# Altium PCB PCB1.PcbDoc
Units mm, origin at the board's own origin, x right, y up, seen from the top; angles counter-clockwise.
Board outline 27.69 x 23.62 mm, 2 copper layers (Top Layer, Bottom Layer); 3 components, 5 nets, 11 pads, 0 vias.
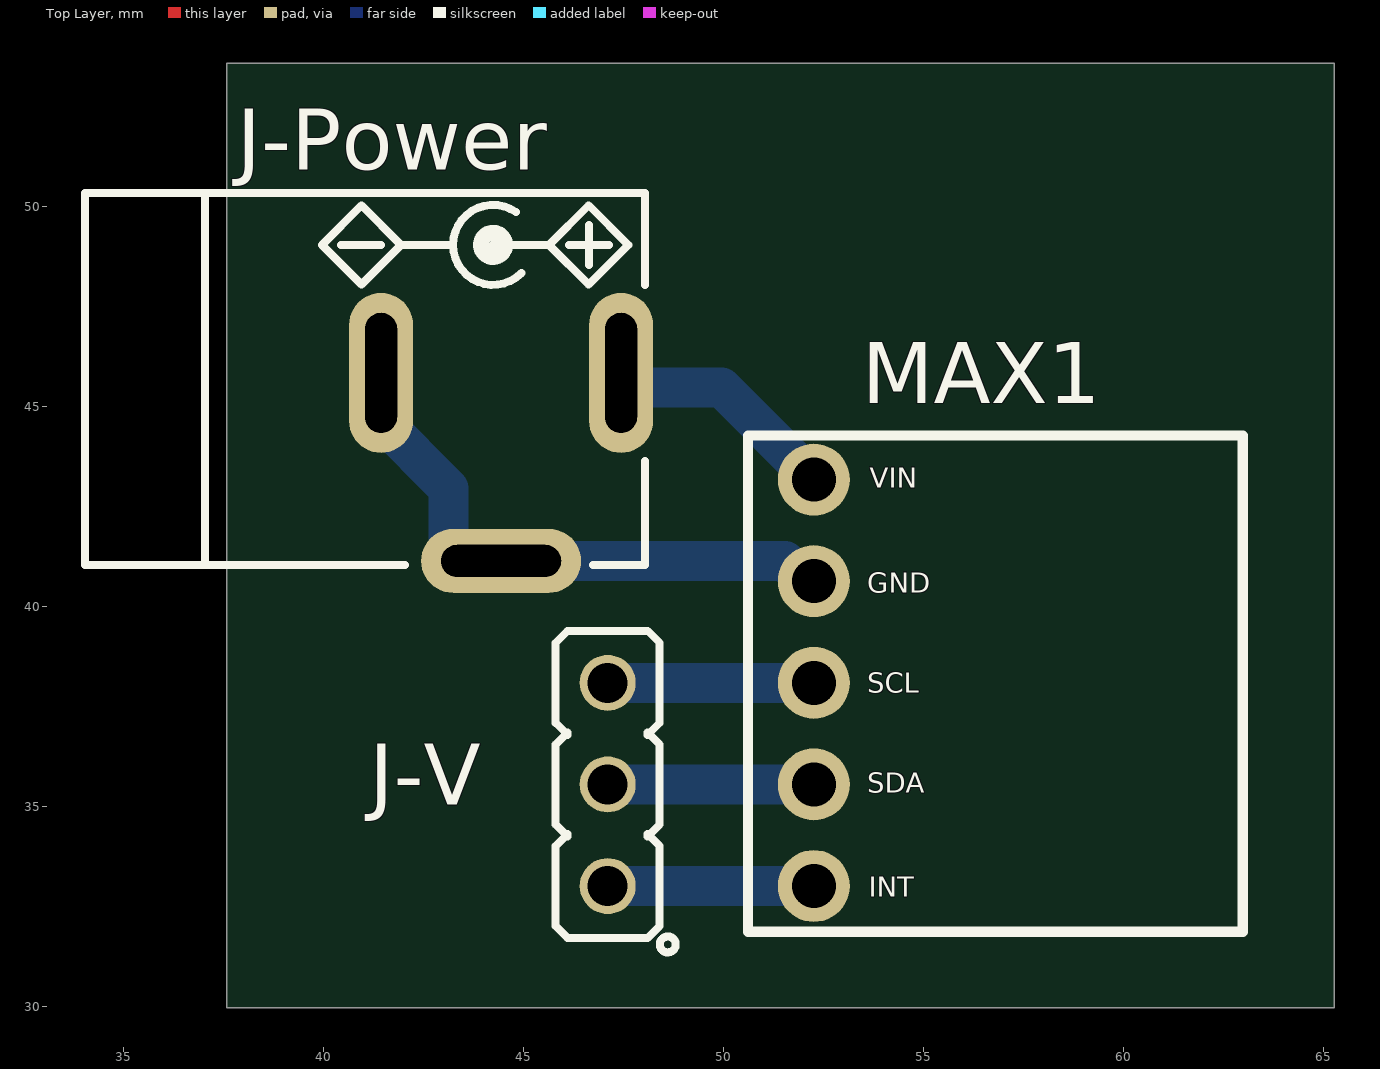
[diagram p0: Top Layer view]
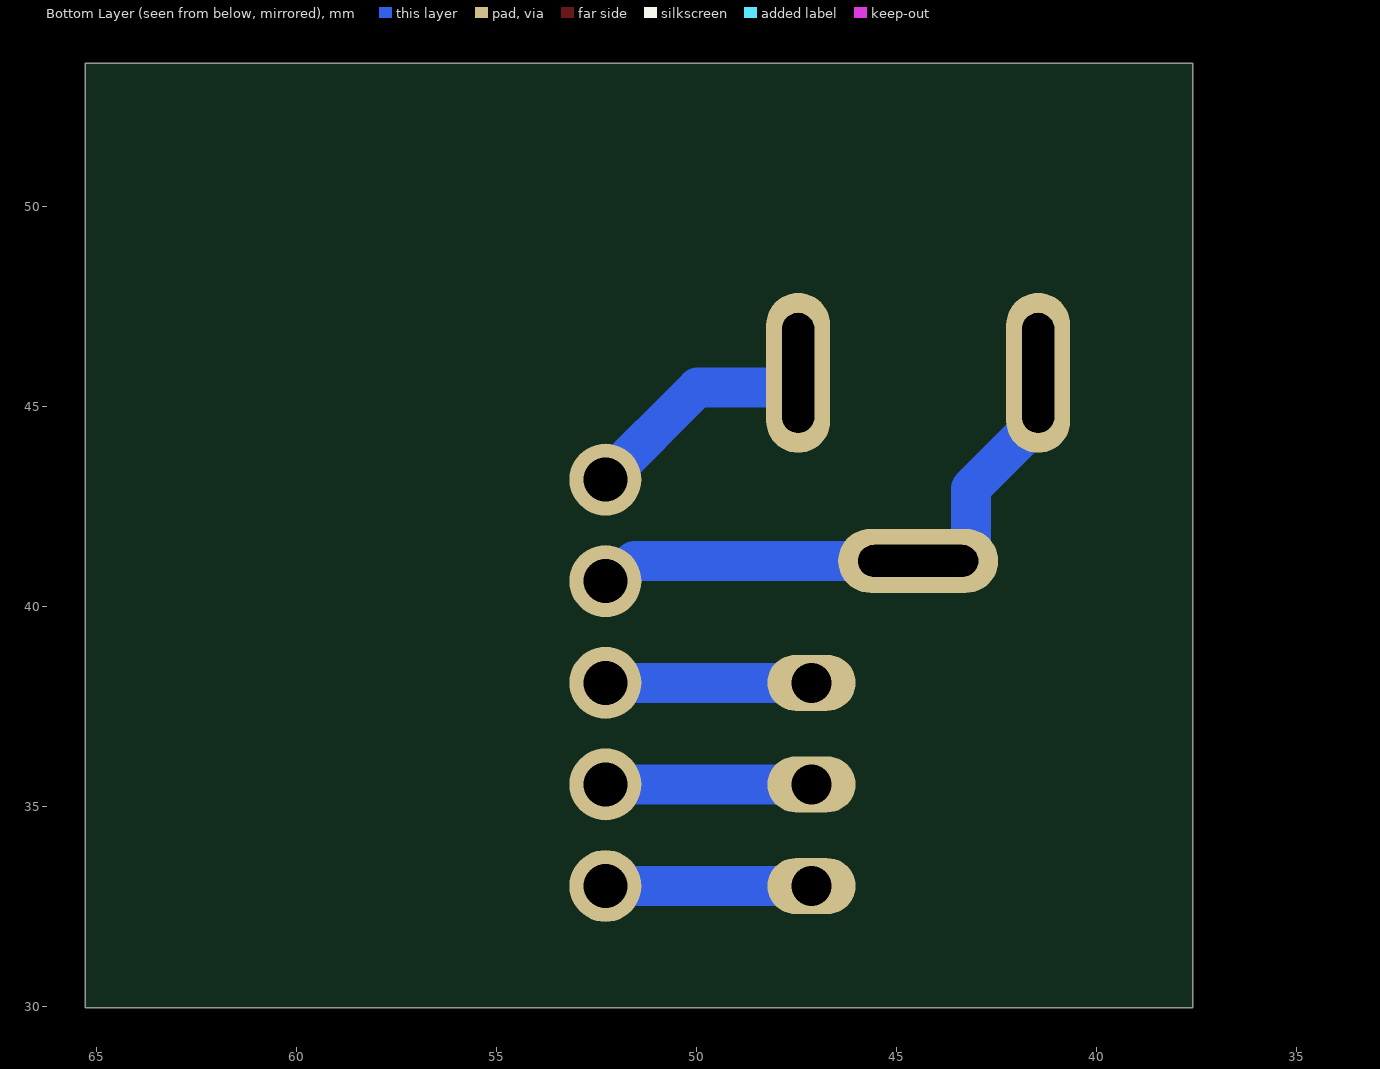
[diagram p1: Bottom Layer view, seen from below]

## Layer stack, top to bottom
Top Solder: solder mask 0.0102, Solder Resist, Dk 3.5
Top Layer: signal copper 0.0356
Dielectric 1: dielectric 0.32, FR-4, Dk 4.8
Bottom Layer: signal copper 0.0356
Bottom Solder: solder mask 0.0102, Solder Resist, Dk 3.5

## Board outline
37.592,29.972 65.278,29.972 65.278,53.594 37.592,53.594

## Design rules (kind name [scope] priority, off if disabled: settings)
Clearance [All] p1: gap=0.254 ignorepadtopadclearanceinfootprint=FALSE
PolygonConnect [All] p1: connectstyle=Relief reliefconductorwidth=0.254 reliefentries=4 polygonreliefangle="90 Angle" airgapwidth=0.254
RoutingVias [All] p1: holewidth=0.711 width=1.27 viastyle="Through Hole" minholewidth=0.711 minwidth=1.27 maxholewidth=0.711 maxwidth=1.27
SolderMaskExpansion [All] p1: expansion=0.102 istentingtop=FALSE
SupplyNets "Schematic Supply Nets_1" [InNet('GND')] p1: voltage=0.000
SupplyNets "Schematic Supply Nets" [InNet('+5')] p2: voltage=0.000
Width [All] p1: maxlimit=2 minlimit=0.5 preferedwidth=1 minimp=50.000000 maximp=50.000000 favimp=50.000000
30 further rules are at their usual default settings.

## Components (designator, comment, footprint, x,y, rotation, side; value= is the part's Value field where it differs from the comment)
J-Power "DC_POWER_JACK" JAC_PWR2 47.45,45.848 r90 top
J-V "HDRM3" HDR_M_1X3 47.117,35.56 r90 top
MAX1 "MAX30102 Module" MAX30102-MODULE 56.769,38.1 r90 top

## Footprints (in the part's own frame and the unit in brackets; to place one, negate y for a bottom-side part, rotate by r counter-clockwise, add the part's x,y. Pads: shape width x height; smd on the part's side, far side on the other; paste and mask are expansions set on the pad)
HDR_M_1X3 [mm] "Connector; Header; 3 Position"
  round 1.4 / inner round 1.4 / far side oval 1.4x2.2 hole 1 mask+0.1: 1(-2.54,0) 2(0,0) 3(2.54,0)
  silkscreen extent -4.2,-1.7 3.84,1.3, body extent -3.78,-1.27 3.84,1.27, height 8.54
JAC_PWR2 [mm] "DC POWER JACK, Power Jack KLDX-0202"
  oval 4x1.6 hole 0.8 slot 3 at 0 deg: 1(0,0) 2(0,6)
  oval 1.6x4 hole 0.8 slot 3 at 90 deg: 3(-4.7,3)
  silkscreen extent -4.8,-0.6 4.5,13.4, body extent -4.9,-0.65 4.5,13.85, height 10.8
MAX30102-MODULE [mm] "MAX30102, Heart Rate Module"
  round 1.8 hole 1.1: 1(5.08,4.5) 2(2.54,4.5) 3(0,4.5) 4(-2.54,4.5) 5(-5.08,4.5)
  silkscreen extent -6.22,-6.22 6.18,6.15, body extent -6,-6 6,6, height 2.11

## Part data
J-Power: library part CONN_PWR_JACKR2, "CONN, PWR JACK DC, PLUG DIAM 2.0MM RA THD", MANF="CUI STACK", MANF_P#="PJ-202A, PJ-002AH, PJ-102AH, KLDX-0202"
J-V: library part HDR_M_1X3, "CONN, HEADER, Male, pitch: 2.54mm, 3POS"
MAX1: library part MODULE-MAX30102, "MAX30102, Heart Rate Module"

## Nets (pads, with @x,y where several pads share a name; then routed paths per layer and width w, separated by ;. In a path a pad name is that pad's centre, name@x,y a point inside that pad or via, vN(x,y) a via of type N, cw(c..) or ccw(c..) an arc to the next point about the centre after c; other vN are vias at no path point)
+5: J-Power.1 MAX1.1 | length 6
  Bottom Layer w1: J-Power.1 47.45,45.76 47.727,45.483 49.966,45.483 MAX1.1
GND: J-Power.2 J-Power.3 MAX1.2 | length 14.6
  Bottom Layer w1: J-Power.2 41.45,44.648 43.135,42.963 43.135,41.425 43.412,41.148 J-Power.3 51.545,41.148 52.053,40.64 MAX1.2
NetJ-V_1: J-V.1 MAX1.5 | length 5.2
  Bottom Layer w1: J-V.1 MAX1.5
NetJ-V_2: J-V.2 MAX1.4 | length 5.2
  Bottom Layer w1: J-V.2 MAX1.4
NetJ-V_3: J-V.3 MAX1.3 | length 5.2
  Bottom Layer w1: J-V.3 MAX1.3

## Text inside footprints (layer, text, board x,y; h text height)
MAX1: Top Overlay "GND" at 53.603,40.35 h0.5; Top Overlay "VIN" at 53.67,42.975 h0.5; Top Overlay "SCL" at 53.603,37.85 h0.5; Top Overlay "SDA" at 53.603,35.35 h0.5; Top Overlay "INT" at 53.644,32.75 h0.5